# Altium PCB TP-EVALBOARD-R01.PcbDoc (part 2 of 2)
Units mm, origin at the board's own origin, x right, y up, seen from the top; angles counter-clockwise.
Board outline 100.28 x 49.1 mm, 2 copper layers (Top Layer, Bottom Layer), stack 1.695 mm thick; 77 components, 72 nets, 330 pads, 183 vias.
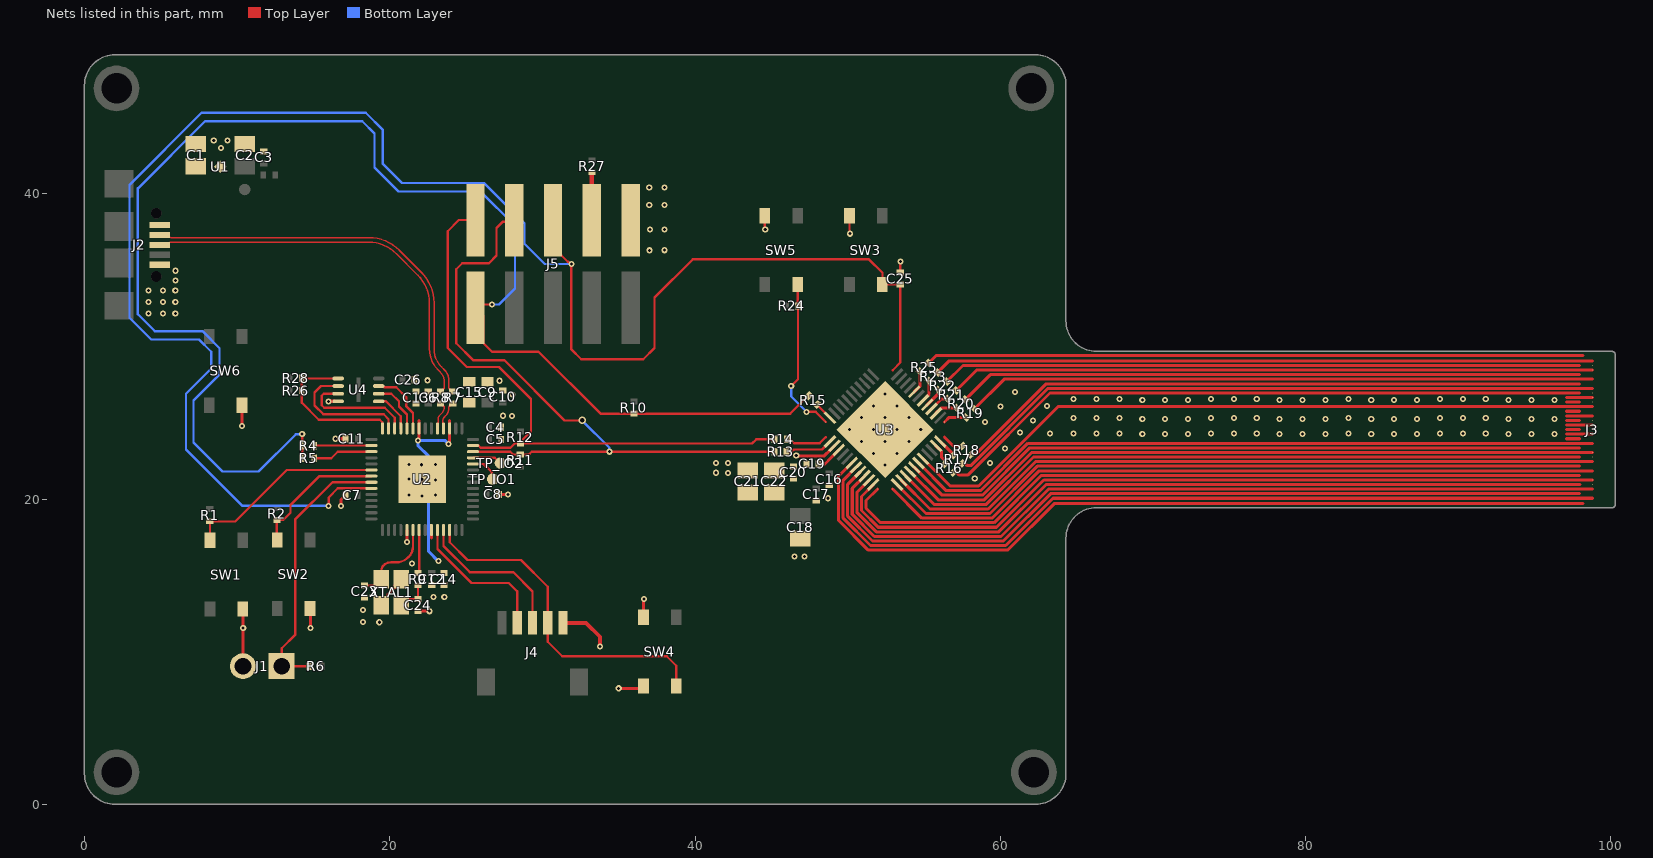
[diagram p2: the nets of this part, all layers, seen from the top]

## Via types
v1: diameter 0.4, hole 0.2, Top Layer to Bottom Layer, tented both sides, 166 vias
v2: diameter 0.5, hole 0.2, Top Layer to Bottom Layer, 16 vias
v3: diameter 0.5, hole 0.3, Top Layer to Bottom Layer, tented both sides, 1 vias

## Nets (pads, with @x,y where several pads share a name; then routed paths per layer and width w, separated by ;. In a path a pad name is that pad's centre, name@x,y a point inside that pad or via, vN(x,y) a via of type N, cw(c..) or ccw(c..) an arc to the next point about the centre after c; other vN are vias at no path point) (continued)
GND: C1.2 C2.2 C3.2 C4.2 C5.2 C6.2 C7.2 C8.2 C9.2 C10.2 C11.2 C12.2 C13.2 C14.2 C15.2 C16.2 C17.2 C18.2 C19.2 C20.2 C21.2 C22.2 C23.2 C24.2 C25.2 C26.2 J1.2 J2.5 J3.15 J3.16 J3.17 J3.18 J3.19 J3.20 J3.21 J3.23 J3.24 J4.5 J5.1 SW1.4 SW2.4 SW3.4 SW4.3 SW4.4 SW5.4 SW6.4 U1.2 U1.5 U2.19 U2.57 U3.3 U3.53 U4.4 XTAL1.2 XTAL1.4 | length 59.7
  Top Layer w0.15: SW5.4@44.575,38.55 44.575,37.675 v1(44.6,37.65) ; v1@50.125,37.375 SW3.4@50.125,38.55 ; C25.2@53.45,34.84 v1(53.45,35.55)
  Top Layer w0.2: v1(10.325,24.775) SW6.4@10.325,26.15 ; SW1.4@10.375,12.8 10.4,12.775 v1(10.4,11.55) 10.38,11.53 J1.2@10.38,9.05 ; SW2.4@14.782,12.821 14.8,12.803 v1(14.8,11.55) ; v1(16.45,23.95) C11.2@17.11,23.95 ; v1(16.8,19.55) 16.8,19.94 C7.2@17.11,20.25 ; XTAL1.2@19.45,13.05 19.85,13.45 19.85,13.726 20.35,14.226 20.35,14.35 XTAL1.4@20.75,14.75 ; v1(21.125,17.175) U2.19@21.125,17.975 ; C24.2@21.901,12.65 v1(22.6,12.65) ; C8.2@27.15,20.3 v1(27.75,20.3) ; v1(35,7.6) 36.475,7.6 SW4.3@36.625,7.75 ; SW4.4@36.625,12.25 36.625,13.425 v1(36.65,13.45) ; v1(46.632,22.864) 46.667,22.829 48.471,22.829 48.849,23.206 U3.3@49.132,23.489 ; 97.08,23.95 97.93,23.95 ; 97.08,24.25 J3.16@98.78,24.25 ; 97.08,24.55 97.93,24.55 ; 97.08,24.85 J3.18@98.78,24.85 ; 97.08,25.15 97.93,25.15 ; 97.08,25.45 J3.20@98.78,25.45 ; 97.08,26.65 J3.24@98.78,26.65 ; 97.092,25.75 97.942,25.75 ; 97.092,26.35 97.942,26.35
  Top Layer w0.25: v1(16,26.4) U4.4@16.375,26.4 ; J4.5@31.35,11.887 32.862,11.887 33.778,10.972 v1(33.778,10.328)
  Bottom Layer w0.2: v2(50.122,24.55) v2(51.677,24.55) ; v2(50.899,23.772) v2(51.677,24.55) ; v2(50.899,25.328) v2(51.677,24.55) ; v2(51.677,22.994) v2(52.455,23.772) ; v2(51.677,26.106) v2(52.455,25.328) ; v2(52.455,22.217) v2(52.455,23.772) ; v2(52.455,26.883) v2(52.455,25.328) ; v2(53.233,22.994) v2(52.455,23.772) ; v2(53.233,26.106) v2(52.455,25.328) ; v2(54.788,24.55) 54.011,24.55 ; v2(51.677,24.55) v2(52.455,25.328) ; v2(51.677,24.55) v2(52.455,23.772) ; v2(51.677,24.55) 52.455,24.55 ; v2(52.455,23.772) 52.455,24.55 ; v2(52.455,23.772) v2(53.233,24.55) ; 52.455,24.55 v2(52.455,25.328) ; 52.455,24.55 v2(53.233,24.55) ; v2(52.455,25.328) v2(53.233,24.55) ; v2(53.233,24.55) v2(54.011,25.328) 54.011,24.55 ; v2(53.233,24.55) v2(54.011,23.772) 54.011,24.55 ; v2(53.233,24.55) 54.011,24.55
  other v1: 19.315,11.927 18.259,11.939 18.259,12.739 22.873,13.574 23.573,13.574 21.455,15.765 46.521,16.243 47.171,16.243 48.7,20.05 22.126,20.197 21.25,20.25 23,20.25 23,21.25 21.25,21.3 22.101,21.297 58.325,21.348 42.163,21.7 41.375,21.722 21.25,22.25 22.076,22.247 23,22.25 41.363,22.35 42.15,22.35 59.325,22.348 60.3,23.3 69.3,24.25 70.8,24.25 72.3,24.25 78.3,24.25 79.8,24.25 81.3,24.25 84.3,24.25 85.8,24.25 87.3,24.25 93.3,24.25 94.8,24.25 96.3,24.25 63.25,24.3 64.8,24.3 66.3,24.3 67.8,24.3 73.8,24.3 75.3,24.3 76.8,24.3 82.8,24.3 88.8,24.3 90.3,24.3 91.8,24.3 61.3,24.35 59,25.05 62.15,25.15 69.3,25.25 70.8,25.25 72.3,25.25 78.3,25.25 79.8,25.25 81.3,25.25 84.3,25.25 85.8,25.25 87.3,25.25 93.3,25.25 94.8,25.25 96.3,25.25 64.8,25.3 66.3,25.3 67.8,25.3 73.8,25.3 75.3,25.3 76.8,25.3 82.8,25.3 88.8,25.3 90.3,25.3 91.8,25.3 28,25.45 27.419,25.455 60,26.05 63.05,26.1 69.3,26.5 70.8,26.5 72.3,26.5 78.3,26.5 79.8,26.5 81.3,26.5 84.3,26.5 85.8,26.5 87.3,26.5 93.3,26.5 94.8,26.5 96.3,26.5 64.8,26.55 66.3,26.55 67.8,26.55 73.8,26.55 75.3,26.55 76.8,26.55 82.8,26.55 88.8,26.55 90.3,26.55 91.8,26.55 28.05,26.85 60.95,27 27.2,27.75 22.48,27.778 4.2,32.15 5.15,32.15 5.95,32.15 4.2,32.9 5.15,32.9 5.95,32.9 4.2,33.65 5.15,33.65 5.95,33.65 5.96,34.304 5.96,34.954 37.024,36.296 38,36.3 50.141,37.381 37.05,37.65 38,37.65 37,39.25 38,39.25 37,40.4 38,40.4 8.95,43 8.47,43.491 9.37,43.491
GPIO4_RND: R1.2 SW1.1 U2.6 | length 13.2
  Top Layer w0.15: SW1.1@8.225,17.3 8.225,18.53 9.22,18.53 9.88,18.53 13.25,21.9 U2.6@18.8,21.9
GPIO5_RND: R2.2 SW2.1 U2.7 | length 8.8
  Top Layer w0.15: SW2.1@12.6,17.353 R2.2@12.6,18.51 ; R2.2@12.613,18.629 13.029,18.629 13.5,19.1 13.5,19.6 15.4,21.5 U2.7@18.8,21.5
GPIO6_SNAP_DOME: J1.1 R6.1 U2.8 | length 17.8
  Top Layer w0.15: R6.1@14.75,9.05 J1.1@12.92,9.05 12.92,10.22 13.8,11.1 13.8,18.65 16.25,21.1 U2.8@18.8,21.1
GPIO7_IQS_nRST: C25.1 J5.5 SW3.1 U2.9 U3.39 | length 116.8
  Top Layer w0.15: v1(16,19.55) 16,20.1 16.6,20.7 U2.9@18.8,20.7 ; J5.5@31.225,37.75 J5.5@30.7,38.275 30.7,36.5 31.225,35.975 31.241,35.975 31.668,35.548 31.687,35.548 31.835,35.4 v1(31.9,35.4) 31.9,29.8 32.55,29.15 36.6,29.15 37.35,29.9 37.35,33.2 39.85,35.7 51.4,35.7 52.275,34.825 SW3.1@52.275,34.05 C25.1@53.45,34.05 53.45,28.939 U3.39@52.95,28.439
  Bottom Layer w0.15: v1(16,19.55) 10.35,19.55 6.65,23.25 6.65,26.9 8.3,28.55 8.3,29.65 7.5,30.45 4.372,30.45 2.95,31.872 2.95,40.578 7.672,45.3 18.428,45.3 19.55,44.178 19.55,41.95 20.8,40.7 26.178,40.7 28.828,38.05 28.828,36.722 30.15,35.4 v1(31.9,35.4)
I2C_SCL: J5.9 R12.1 R14.1 U2.41 | length 39.8
  Top Layer w0.15: U2.41@25.45,23.5 25.46,23.49 25.833,23.49 25.973,23.35 27.9,23.35 28.186,23.636 28.56,23.636 R12.1@28.564,23.64 43.74,23.64 44.007,23.907 R14.1@45.213,23.907 ; J5.9@25.62,38.275 24.525,38.275 23.8,37.55 23.8,29.9 25.05,28.65 27.15,28.65 29.25,26.55 29.25,24.422 28.729,23.901 28.729,23.755 R12.1@28.627,23.654
I2C_SDA: J5.7 R11.1 R13.1 U2.40 | length 44.1
  Top Layer w0.15: U2.40@25.45,23.1 27.9,23.1 28.077,22.923 29.123,22.923 29.3,23.1 v1(34.4,23.1) R13.1@45.21,23.1 ; J5.7@28.16,38.275 28.058,38.173 27.423,38.173 27,37.75 27,35.945 26.505,35.45 24.75,35.45 24.35,35.05 24.35,30.2 25.45,29.1 27.5,29.1 31.45,25.15 v3(32.6,25.15)
  Bottom Layer w0.15: v3(32.6,25.15) 34.374,23.376 34.374,23.126 v1(34.4,23.1)
IQS_RDY: J5.10 R4.2 R5.2 R10.1 R15.1 | length 96
  Top Layer w0.15: R5.2@14.265,22.672 R4.2@14.265,23.5 v1(14.265,24.25) ; v1(26.7,32.75) 25.845,32.75 J5.10@25.62,32.525 26.145,32 26.145,30.205 26.7,29.65 29.75,29.65 33.805,25.595 R10.1@36,25.595 46.245,25.595 R15.1@47.45,26.8
  Bottom Layer w0.15: v1(14.265,24.25) 13.85,24.25 11.4,21.8 9.05,21.8 7.15,23.7 7.15,26.45 8.85,28.15 8.85,29.878 7.728,31 4.6,31 3.5,32.1 3.5,40.35 7.9,44.75 18.2,44.75 19,43.95 19,41.722 20.572,40.15 25.95,40.15 28.2,37.9 28.2,33.8 27.15,32.75 v1(26.7,32.75)
IQS_RX0: J3.25 R16.2 | length 43.4
  Top Layer w0.2: R16.2@56.93,21.753 56.966,21.788 57.093,21.788 57.319,21.562 57.862,21.562 63.25,26.95 64.3,26.95 94.299,26.95 94.3,26.95 97.942,26.95
IQS_RX1: J3.33 R25.2 | length 43.1
  Top Layer w0.2: R25.2@55.3,28.9 55.8,29.4 98.18,29.4
IQS_RX2: J3.31 R22.2 | length 41.9
  Top Layer w0.2: R22.2@56.5,27.7 57.55,28.75 97.93,28.75
IQS_RX3: J3.29 R20.2 | length 40.9
  Top Layer w0.2: R20.2@57.709,26.509 59.35,28.15 97.93,28.15
IQS_RX4: J3.27 R18.2 | length 41.8
  Top Layer w0.2: R18.2@58.08,22.903 58.116,22.938 58.388,22.938 63,27.55 64.3,27.55 94.299,27.55 94.3,27.55 97.93,27.55
IQS_RX5: J3.26 R17.2 | length 43.5
  Top Layer w0.2: R17.2@57.501,22.332 57.536,22.368 57.664,22.368 57.842,22.19 58.064,22.19 63.124,27.25 64.3,27.25 94.299,27.25 94.3,27.25 98.53,27.25 98.534,27.25 J3.26@98.78,27.25
IQS_RX6: J3.28 R19.2 | length 41.3
  Top Layer w0.2: R19.2@58.309,25.909 60.25,27.85 J3.28@98.78,27.85
IQS_RX7: J3.32 R23.2 | length 43.2
  Top Layer w0.2: R23.2@55.9,28.3 56.65,29.05 97.08,29.05 J3.32@98.78,29.05
IQS_RX8: J3.30 R21.2 | length 42.2
  Top Layer w0.2: R21.2@57.109,27.109 58.45,28.45 J3.30@98.78,28.45
IQS_SW_IN: R24.1 SW5.1 U3.52 | length 10.5
  Top Layer w0.15: v1(46.3,27.4) 46.74,27.84 R24.1@46.74,32.65 46.725,32.665 SW5.1@46.725,34.05 ; v1(47.311,25.711) 47.9,25.711 U3.52@48.566,25.045
  Bottom Layer w0.15: v1(46.3,27.4) 46.3,26.722 v1(47.311,25.711)
IQS_TX0: J3.14 U3.20 | length 46.2
  Top Layer w0.2: U3.20@54.647,22.358 56.455,20.55 58.704,20.55 61.804,23.65 61.879,23.65 62.6,23.65 J3.14@98.78,23.65
IQS_TX1: J3.12 U3.18 | length 46.7
  Top Layer w0.2: U3.18@54.081,21.792 55.924,19.95 58.953,19.95 62.053,23.05 62.127,23.05 64.3,23.05 94.297,23.05 94.299,23.05 98.53,23.05 98.534,23.05 J3.12@98.78,23.05
IQS_TX2: J3.2 U3.8 | length 54.8
  Top Layer w0.2: U3.8@50.546,22.075 49.7,21.229 49.7,18.75 51.5,16.95 60.35,16.95 63.45,20.05 J3.2@98.78,20.05
IQS_TX3: J3.4 U3.10 | length 53.2
  Top Layer w0.2: U3.10@51.112,21.509 50.3,20.698 50.3,19 51.75,17.55 60.05,17.55 63.15,20.65 64.3,20.65 J3.4@98.78,20.65
IQS_TX4: J3.6 U3.12 | length 51.6
  Top Layer w0.2: U3.12@51.677,20.944 50.9,20.167 50.9,19.249 51.999,18.15 59.75,18.15 62.85,21.25 64.3,21.25 94.297,21.25 94.299,21.25 98.53,21.25 98.534,21.25 J3.6@98.78,21.25
IQS_TX5: J3.8 U3.14 | length 47.9
  Top Layer w0.2: U3.14@52.95,20.661 54.861,18.75 59.45,18.75 62.55,21.85 64.3,21.85 94.297,21.85 94.299,21.85 98.53,21.85 98.534,21.85 J3.8@98.78,21.85
IQS_TX6: J3.10 U3.16 | length 47.3
  Top Layer w0.2: U3.16@53.516,21.227 55.392,19.35 59.201,19.35 62.301,22.45 62.376,22.45 64.3,22.45 94.297,22.45 94.299,22.45 98.53,22.45 98.534,22.45 J3.10@98.78,22.45
IQS_TX7: J3.22 U3.21 | length 46.7
  Top Layer w0.2: U3.21@54.93,22.641 56.721,20.85 58.58,20.85 61.68,23.95 ; 61.681,23.95 63.781,26.05 J3.22@98.78,26.05
IQS_TX8: J3.1 U3.7 | length 55
  Top Layer w0.2: U3.7@50.263,22.358 49.4,21.495 49.4,18.6 51.35,16.65 60.474,16.65 63.524,19.7 98.18,19.7
IQS_TX9: J3.3 U3.9 | length 53.1
  Top Layer w0.2: U3.9@50.829,21.792 50,20.964 50,18.876 51.626,17.25 60.2,17.25 63.3,20.35 97.931,20.35
IQS_TX10: J3.5 U3.11 | length 51.6
  Top Layer w0.2: U3.11@51.394,21.227 50.6,20.432 50.6,19.124 51.874,17.85 59.9,17.85 63,20.95 97.981,20.95
IQS_TX11: J3.7 U3.13 | length 50
  Top Layer w0.2: U3.13@51.96,20.661 51.2,19.901 51.2,19.4 52.15,18.45 59.6,18.45 62.7,21.55 63.851,21.55 97.931,21.55
IQS_TX12: J3.9 U3.15 | length 46.8
  Top Layer w0.2: U3.15@53.233,20.944 55.127,19.05 59.326,19.05 62.426,22.15 62.5,22.15 64.3,22.15 94.297,22.15 94.299,22.15 97.93,22.15
IQS_TX13: J3.11 U3.17 | length 46.2
  Top Layer w0.2: U3.17@53.799,21.509 55.658,19.65 59.077,19.65 62.177,22.75 62.251,22.75 64.3,22.75 94.297,22.75 94.299,22.75 97.93,22.75
IQS_TX14: J3.13 U3.19 | length 45.6
  Top Layer w0.2: U3.19@54.364,22.075 56.189,20.25 58.829,20.25 61.929,23.35 62.003,23.35 62.724,23.35 97.93,23.35
NetC24_1: C24.1 R9.1 XTAL1.3 | length 2.1
  Top Layer w0.15: XTAL1.3@20.75,13.05 21.15,13.45 C24.1@21.852,13.45 ; C24.1@21.85,13.538 R9.1@21.85,14.355
NetJ5_3: J5.3 R27.2 | length 3.2
  Top Layer w0.2: R27.2@33.22,41.375 R27.2@33.28,41.435
  Top Layer w0.3: J5.3@33.24,38.275 R27.2@33.24,41.39
NetR4_1: R4.1 U2.2 | length 3.7
  Top Layer w0.15: R4.1@15.055,23.5 U2.2@18.8,23.5
NetR5_1: R5.1 U2.3 | length 3.9
  Top Layer w0.15: R5.1@15.049,22.666 16.166,22.666 16.6,23.1 U2.3@18.8,23.1
NetR13_2: R13.2 U3.2 | length 3.1
  Top Layer w0.15: R13.2@46,23.1 46.338,23.1 46.477,23.239 48.315,23.239 U3.2@48.849,23.772
NetR14_2: R14.2 U3.1 | length 2.8
  Top Layer w0.15: R14.2@46.003,23.907 46.091,23.82 46.33,23.82 46.5,23.65 48.161,23.65 U3.1@48.566,24.055
NetR15_2: R15.2 U3.51 | length 1.3
  Top Layer w0.15: R15.2@48.009,26.241 48.009,26.168 U3.51@48.849,25.328
NetR16_1: R16.1 U3.24 | length 1.5
  Top Layer w0.2: U3.24@55.778,23.489 56.146,23.122 56.146,22.735 56.407,22.474 56.407,22.347 R16.1@56.372,22.312
NetR17_1: R17.1 U3.25 | length 1.2
  Top Layer w0.2: U3.25@56.061,23.772 U3.25@56.386,23.448 ; U3.25@56.386,23.448 R17.1@56.942,22.891
NetR18_1: R18.1 U3.26 | length 1.5
  Top Layer w0.2: U3.26@56.344,24.055 56.937,23.462 57.324,23.462 57.359,23.426 57.486,23.426 R18.1@57.522,23.462
NetR19_1: R19.1 U3.27 | length 1.6
  Top Layer w0.2: U3.27@56.344,25.045 56.649,25.35 57.552,25.35 57.587,25.385 57.715,25.385 R19.1@57.75,25.35
NetR20_1: R20.1 U3.29 | length 1.5
  Top Layer w0.2: U3.29@55.778,25.611 56.12,25.952 56.427,25.952 56.429,25.95 56.952,25.95 56.987,25.985 57.115,25.985 R20.1@57.15,25.95
NetR21_1: R21.1 U3.30 | length 1.4
  Top Layer w0.2: U3.30@55.496,25.894 56.152,26.55 56.352,26.55 56.387,26.585 56.515,26.585 R21.1@56.55,26.55
NetR22_1: R22.1 U3.31 | length 1.3
  Top Layer w0.2: U3.31@55.213,26.176 55.941,26.905 55.941,26.943 55.977,26.979 55.977,27.106 R22.1@55.941,27.141
NetR23_1: R23.1 U3.32 | length 1.5
  Top Layer w0.2: U3.32@54.93,26.459 55.341,26.871 55.341,27.543 55.377,27.579 55.377,27.706 R23.1@55.341,27.741
NetR25_1: R25.1 U3.34 | length 1.5
  Top Layer w0.2: U3.34@54.364,27.025 54.747,27.407 54.747,28.149 54.777,28.179 54.777,28.306 R25.1@54.741,28.341
NetTP_IO1_TP: TP_IO1.TP U2.38 | length 1.8
  Top Layer w0.15: U2.38@25.45,22.3 26.15,22.3 26.676,21.774 TP_IO1.TP@26.676,21.374
NetTP_IO2_TP: TP_IO2.TP U2.39 | length 1.9
  Top Layer w0.15: U2.39@25.45,22.7 26.876,22.7 TP_IO2.TP@27.226,22.35
QSPI_SCLK: U2.52 U4.6 | length 3.5
  Top Layer w0.15: U4.6@19.275,26.9 20.1,26.9 20.6,26.4 20.6,26.065 21.125,25.54 U2.52@21.125,24.625
QSPI_SD0: U2.53 U4.5 | length 2.7
  Top Layer w0.15: U4.5@19.275,26.4 19.752,26.4 20.725,25.427 U2.53@20.725,24.625
QSPI_SD1: U2.55 U4.2 | length 8.4
  Top Layer w0.15: U4.2@16.625,27.4 15.5,27.4 15.077,26.977 15.077,26.123 15.652,25.548 19.602,25.548 19.925,25.225 U2.55@19.925,24.625
QSPI_SD2: U2.54 U4.3 | length 7.6
  Top Layer w0.15: U4.3@16.625,26.9 15.684,26.9 15.55,26.766 15.55,26.142 15.715,25.977 19.673,25.977 20.325,25.325 U2.54@20.325,24.625
QSPI_SD3: U2.51 U4.7 | length 4.3
  Top Layer w0.15: U4.7@19.275,27.4 19.552,27.4 19.636,27.316 20.42,27.316 21.09,26.646 21.09,26.07 21.525,25.635 U2.51@21.525,24.625
QSPI_SS: R26.2 R28.2 U2.56 U4.1 | length 10.2
  Top Layer w0.15: U4.1@16.625,27.9 14.244,27.9 14.235,27.891 R26.2@14.235,27.104 14.235,26.315 15.352,25.198 19.352,25.198 19.515,25.035 19.515,24.635 U2.56@19.525,24.625
RUN: J4.4 SW4.1 U2.26 | length 22.4
  Top Layer w0.15: U2.26@23.925,17.975 23.925,17.175 25.1,16 28.6,16 30.35,14.25 J4.4@30.35,11.887 30.35,10.65 31.3,9.7 38.15,9.7 38.775,9.075 SW4.1@38.775,7.75
SWCLK: J4.2 U2.24 | length 10.4
  Top Layer w0.15: U2.24@23.125,17.975 23.125,16.725 25.35,14.5 27.8,14.5 28.35,13.95 J4.2@28.35,11.887 28.558,12.095 J4.2@28.558,12.542
SWDIO: J4.3 U2.25 | length 9.4
  Top Layer w0.15: U2.25@23.525,17.975 23.525,16.925 25.25,15.2 28.1,15.2 29.35,13.95 29.35,12.7
USB_D_N: J2.2 R7.1 | length 26
  Top Layer w0.1: J2.2@5.401,37.299 5.488,37.212 ccw(c5.698,37.423) 5.489,37.211 ccw(c5.698,37.423) 5.698,37.125 18.625,37.125 cw(c18.625,34.289) 20.63,36.294 22.069,34.855 cw(c20.064,32.85) 22.9,32.85 22.9,29.85 ccw(c24.59,29.85) 23.395,28.655 23.546,28.504 cw(c22.751,27.709) 23.875,27.709 23.875,27.285 ccw(c23.975,27.285) 23.904,27.214 23.915,27.203 ccw(c23.959,27.247) 23.959,27.185 cw(c23.959,27.123) 24.003,27.167 R7.1@24.125,27.045
USB_D_P: J2.3 R8.1 | length 26
  Top Layer w0.1: J2.3@4.925,36.65 5.276,36.65 ccw(c5.276,36.949) 5.488,36.738 cw(c5.699,36.526) 5.699,36.825 18.623,36.825 cw(c18.623,34.285) 20.419,36.081 21.856,34.644 cw(c20.06,32.848) 22.6,32.848 22.6,29.848 ccw(c24.584,29.848) 23.181,28.445 23.29,28.336 cw(c22.601,27.647) 23.575,27.647 23.575,27.285 cw(c23.475,27.285) 23.546,27.214 23.535,27.203 cw(c23.491,27.247) 23.491,27.185 ccw(c23.491,27.123) 23.447,27.167 R8.1@23.325,27.045
USB_MCU_D_N: R7.2 U2.46 | length 1.9
  Top Layer w0.1: U2.46@23.525,24.625 23.525,24.917 ccw(c23.44,24.917) 23.5,24.977 cw(c23.56,25.037) 23.475,25.037 23.475,25.134 cw(c23.793,25.134) 23.568,25.359 ; 23.568,25.359 23.675,25.466 ccw(c23.192,25.949) 23.875,25.949 23.875,25.999 cw(c24.013,25.999) 23.915,26.097 cw(c23.959,26.053) 23.959,26.115 ccw(c23.959,26.177) 24.003,26.133 R7.2@24.125,26.255
USB_MCU_D_P: R8.2 U2.47 | length 1.9
  Top Layer w0.1: U2.47@23.125,24.625 23.125,24.917 cw(c23.21,24.917) 23.15,24.977 ccw(c23.09,25.037) 23.175,25.037 23.175,25.267 cw(c23.473,25.267) 23.262,25.477 23.427,25.642 ; R8.2@23.325,26.255 23.447,26.133 ccw(c23.491,26.177) 23.491,26.115 cw(c23.491,26.053) 23.535,26.097 cw(c23.437,25.999) 23.575,25.999 cw(c23.07,25.999) 23.427,25.642
VBUS: C1.1 J2.1 U1.3 U1.4
VREG: C19.1 C20.1 C21.1 C22.1 U3.4 | length 1.7
  Top Layer w0.2: C19.1@48.09,22.3 48.508,22.3 48.89,22.682 U3.4@49.414,23.206
VREG_VOUT: C13.1 C14.1 C15.1 U2.23 U2.45 U2.50 | length 14
  Top Layer w0.2: v1(21.838,23.846) 21.838,23.9 21.925,23.987 21.925,25.153 ; 22.725,17.447 U2.23@22.725,17.975 ; v1(23.85,23.6) 23.85,23.654 23.925,23.729 U2.45@23.925,24.625 23.925,25.153
  Bottom Layer w0.2: v1(23.183,15.927) 22.55,16.56 22.55,22.8 21.838,23.512 v1(21.838,23.846) 23.604,23.846 v1(23.85,23.6)
XIN: C23.1 U2.20 XTAL1.1 | length 5.8
  Top Layer w0.15: C23.1@18.35,14.34 19.04,14.34 XTAL1.1@19.45,14.75 19.45,15.288 cw(c19.962,15.288) 19.6,15.65 cw(c20.083,15.167) 20.083,15.85 20.396,15.85 ccw(c20.396,17.033) 21.233,16.196 ccw(c20.528,16.902) 21.525,16.902 U2.20@21.525,17.975
XOUT: R9.2 U2.21 | length 2.8
  Top Layer w0.15: R9.2@21.925,15.17 U2.21@21.925,17.975
pads on no net: J2.MH1 J2.MH2 J2.Shell J4.MT J5.2 J5.4 J5.6 J5.8 MP1.4 MP2.4 MP3.4 MP4.4 SW1.2 SW1.3 SW2.2 SW2.3 SW3.2 SW3.3 SW4.2 SW5.2 SW5.3 SW6.2 SW6.3 U2.4 U2.5 U2.11 U2.12 U2.13 U2.14 U2.15 U2.16 U2.17 U2.18 U2.27 U2.28 U2.29 U2.30 U2.31 U2.32 U2.34 U2.35 U2.36 U2.37 U3.6 U3.22 U3.23 U3.28 U3.33 U3.35 U3.36 U3.37 U3.38 U3.40 U3.41 U3.42 U3.43 U3.44 U3.45 U3.46 U3.47 U3.48 U3.49 U3.50 U4.9

## Polygon pours and split planes (outlines as drawn)
no net on Layer0 "Default Coverlay 1 Bottom" (split plane): 0,1.803 0.077,1.417 0.228,1.053 0.446,0.725 0.725,0.447 1.053,0.228 1.417,0.077 1.803,0 62.497,0 62.883,0.077 63.247,0.228 63.575,0.447 63.854,0.725 64.072,1.053 64.223,1.417 64.3,1.803 64.3,17.43 64.31,17.626 64.386,18.011 64.536,18.373 64.754,18.699 65.031,18.976 65.357,19.194 65.719,19.344 66.104,19.42 66.3,19.43 94.297,19.43 98.53,19.43 100.08,19.43 100.12,19.43 100.193,19.46 100.25,19.517 100.28,19.59 100.28,19.63 100.28,29.47 100.28,29.51 100.25,29.583 100.193,29.64 100.12,29.67 100.08,29.67 94.3,29.67 66.3,29.67 66.104,29.68 65.719,29.756 65.357,29.906 65.031,30.124 64.754,30.401 64.536,30.727 64.386,31.089 64.31,31.474 64.3,31.67 64.3,47.1 64.3,47.297 64.223,47.683 64.072,48.047 63.854,48.375 63.575,48.654 63.247,48.872 62.883,49.023 62.497,49.1 1.803,49.1 1.417,49.023 1.053,48.872 0.725,48.654 0.446,48.375 0.228,48.047 0.077,47.683 0,47.297 0,47.1
no net on Layer0 "Default Coverlay 5 Bottom" (split plane): 100.08,19.43 100.12,19.43 100.193,19.46 100.25,19.517 100.28,19.59 100.28,19.63 100.28,29.47 100.28,29.51 100.25,29.583 100.193,29.64 100.12,29.67 100.08,29.67 98.534,29.67 98.53,19.43
no net on Layer0 "Default Coverlay 4 Top" (split plane): 100.28,19.63 100.28,29.47 100.28,29.51 100.25,29.583 100.193,29.64 100.12,29.67 100.08,29.67 94.3,29.67 94.297,19.43 100.08,19.43 100.12,19.43 100.193,19.46 100.25,19.517 100.28,19.59 100.28,19.63
GND on Bottom Layer "NONET_L04_P-001" (solid, remove dead copper, pour order 23): 0,2 ccw(c2,2) 2,0 62.3,0 ccw(c62.3,2) 64.3,2 64.3,17.43 cw(c66.3,17.43) 66.3,19.43 94.297,19.43 98.53,19.43 100.08,19.43 ccw(c100.08,19.63) 100.28,19.63 100.28,29.47 ccw(c100.08,29.47) 100.08,29.67 94.3,29.67 66.3,29.67 cw(c66.3,31.67) 64.3,31.67 64.3,47.1 ccw(c62.3,47.1) 62.3,49.1 2,49.1 ccw(c2,47.1) 0,47.1
3V3 on Bottom Layer "NONET_L04_P-001" (solid, pour order 21): 44.35,19.55 45.7,19.55 45.7,5.75 42.75,2.8 9.15,2.8 1,10.95 1,41.8 6.95,47.75 23.3,47.75 24.55,46.5 24.55,42.95 23.05,41.45 21.75,41.45 20.45,42.75 20.45,44.9 19,46.35 7.8,46.35 2.55,41.1 2.55,31.45 5.7,28.3 5.7,8.4 10.05,4.05 41.95,4.05 44.35,6.45
no net on Layer0 "Default Coverlay 4 Bottom" (split plane): 100.28,19.63 100.28,29.47 100.28,29.51 100.25,29.583 100.193,29.64 100.12,29.67 100.08,29.67 94.3,29.67 94.297,19.43 100.08,19.43 100.12,19.43 100.193,19.46 100.25,19.517 100.28,19.59 100.28,19.63
GND on Top Layer "NONET_L04_P-001" (solid, pour order 48): 62.6,27.85 60.723,27.85 57.222,24.349 58.51,23.06 63,27.55
3V3 on Top Layer "NONET_L04_P-001" (solid, pour order 47): 20,23.85 20.95,23.85 21.35,23.45 21.966,23.45 22.216,23.7 22.8,23.7 22.95,23.55 22.95,23.25 22.8,23.1 20.15,23.1 20,22.95
GND on Top Layer "NONET_L04_P-001" (solid, pour order 46): 35.18,40.65 35.33,40.8 38.25,40.8 38.55,40.5 38.55,36.05 38.2,35.7 35.38,35.7 35.18,35.9
3V3 on Top Layer "NONET_L04_P-001" (solid, pour order 45): 18.862,24 19.9,24 20.05,23.85 20.05,19.55 20.35,19.25 23.9,19.25 24.25,19.6 24.25,24.053 24.315,24.119 24.802,24.119 24.905,24.015 24.905,18.966 24.639,18.7 19.6,18.7 19.329,18.971 19.329,20.146 19.275,20.2 19.009,20.2 19.009,20.402 19.277,20.402 19.329,20.465 19.329,23.601 19.118,23.812 18.878,23.812
3V3 on Top Layer "NONET_L04_P-001" (solid, pour order 35): 24.223,25.08 24.229,25.086 24.229,25.229 24.389,25.389 25.693,25.389 25.938,25.634 25.938,26.646 26.013,26.721 26.873,26.721 26.953,26.641 26.953,25.101 26.788,24.935 26.788,24.282 26.788,23.635 26.747,23.594 26.135,23.594 25.892,23.837 25.892,24.851 25.668,25.074 24.226,25.074
GND on Top Layer "NONET_L04_P-001" (solid, pour order 44): 24.807,27.99 27.31,27.99 28.3,27 28.3,26.7 28.2,26.6 27.5,26.6 26.74,27.36 24.803,27.36
GND on Top Layer "NONET_L04_P-001" (solid, pour order 43): 27.11,23.66 27.105,23.665 27.105,25.705 27.3,25.9 27.95,25.9 28.3,25.55 28.3,25 27.75,24.45 27.75,23.92 27.49,23.66
GND on Top Layer "NONET_L04_P-001" (solid, pour order 42): 46.225,17.95 46.225,15.675 46.45,15.45 47.3,15.45 47.574,15.724 47.574,17.949 47.575,17.95
GND on Top Layer "NONET_L04_P-001" (solid, pour order 41): 21.252,14.15 20.251,14.146 20.25,15.35 20.5,15.6 20.9,15.6 21.3,16 21.637,16 21.702,15.935 21.7,15.6 21.612,15.525 21.425,15.525 21.25,15.35
GND on Top Layer "NONET_L04_P-001" (solid, pour order 40): 22.414,14.538 22.414,13.301 22.576,13.139 23.789,13.139 23.955,13.305 23.955,14.551 23.874,14.633 22.509,14.633
VREG_VOUT on Top Layer "NONET_L04_P-001" (solid, pour order 37): 23.318,14.852 23.251,14.919 23.251,15.549 22.626,16.174 22.626,17.547 22.828,17.547 22.828,16.572 23.835,15.565 23.835,14.902 23.785,14.852
3V3 on Top Layer "NONET_L04_P-001" (solid, pour order 36): 22.518,14.869 22.451,14.937 22.451,15.404 22.224,15.63 22.224,17.565 22.425,17.565 22.425,16.025 23.034,15.416 23.034,14.919 22.985,14.869
VREG_VOUT on Top Layer "NONET_L04_P-001" (solid, pour order 34): 23.824,25.124 23.824,25.248 24.034,25.596 24.178,25.835 24.763,25.835 24.763,26.625 24.839,26.7 25.605,26.7 25.673,26.633 25.673,25.759 25.463,25.55 24.25,25.55 24.019,25.122
VREG_VOUT on Top Layer "NONET_L-01_P-001" (solid, remove dead copper, pour order 32): 22.025,26.388 22.025,25.074 21.827,25.074 21.827,25.656 21.408,26.075 21.408,26.405 21.458,26.455 21.958,26.455
3V3 on Top Layer "NONET_L04_P-001" (solid, pour order 27): 21.03,28.061 21.056,28.03 21.056,27.572 21.037,27.546 20.096,27.546 19.846,27.735 18.978,27.735 18.886,27.833 18.886,27.974 18.957,28.061 18.98,28.061
3V3 on Top Layer "NONET_L-01_P-001" (solid, remove dead copper, pour order 30): 22.825,26.405 22.825,25.105 22.225,25.105 22.225,26.405 22.275,26.455 22.775,26.455
GND on Top Layer "NONET_L-01_P-001" (solid, remove dead copper, pour order 28): 22.825,26.878 22.775,26.828 21.475,26.828 21.425,26.878 21.425,28.028 21.475,28.078 22.775,28.078 22.825,28.028
3V3 on Top Layer "NONET_L04_P-001" (solid, pour order 20): 46.225,19.545 46.22,19.55 44.35,19.55 44.35,18.55 44.55,18.35 47.575,18.35 47.575,19.36
GND on Top Layer "NONET_L04_P-001" (solid, pour order 0): 64.45,26.95 63.261,26.95 58.078,21.788 57.199,21.788 56.895,21.449 56.721,20.85 58.58,20.85 63.6,26.25 64.45,26.25
GND on Top Layer "NONET_L04_P-001" (solid, pour order 1): 63.894,25.85 63.58,25.85 61.68,23.95 61.68,23.85 63.894,23.85
VREG on Top Layer "NONET_L04_P-001" (solid, pour order 5): 47.9,22.54 47.9,22.06 46.69,21.54 46.21,21.54 46.21,21.16 46.013,20.95 42.775,20.95 42.775,19.9 45.87,19.9 46.601,20.381 48.28,22.06 48.28,22.54
GND on Top Layer "NONET_L04_P-001" (solid, pour order 11): 18.59,13.74 17.54,13.74 17.2,13.4 17.2,12.15 17.85,11.5 19.6,11.5 19.95,11.85 19.95,13.65 18.68,13.65
3V3_REG on Top Layer "NONET_L04_P-001" (solid, pour order 12): 9.139,41.295 9.131,41.303 9.131,41.421 9.314,41.605 9.69,41.605 9.825,41.74 9.825,42.325 11.175,42.325 11.325,42.175 11.99,42.175 11.99,41.795 11.9,41.705 11.9,40.985 11.52,40.985 11.23,41.275 9.825,41.275 9.805,41.295 9.129,41.295
GND on Top Layer "NONET_L04_P-001" (solid, pour order 16): 6.625,43.775 11.175,43.775 11.985,42.965 11.99,42.965 11.99,42.587 11.512,42.587 11.51,42.585 11.37,42.725 9.825,42.725 9.589,42.489 9.589,41.945 9.31,41.945 9.31,41.775 8.9,41.365 8.491,41.775 8.9,42.185 8.9,42.365 8.9,42.484 8.659,42.725 6.625,42.725
GND on Top Layer "NONET_L04_P-001" (solid, pour order 18): 4.214,35.555 3.972,35.294 3.972,34.2 3.973,31.596 4.139,31.43 6.239,31.43 6.339,31.53 6.339,35.33 6.114,35.555
VBUS on Top Layer "NONET_L04_P-001" (solid, pour order 19): 8.671,42.255 8.671,42.13 8.485,41.945 8.394,41.945 8.394,41.605 8.486,41.605 8.67,41.42 8.67,41.295 7.995,41.295 7.1,40.4 7.1,38.4 6.45,37.75 4.25,37.75 3.972,38.028 3.972,40.022 6.275,42.325 7.975,42.325 8.045,42.255 8.668,42.255
no net on Layer0 "Default Coverlay 1 Top" (split plane): 0,1.803 0.077,1.417 0.228,1.053 0.446,0.725 0.725,0.447 1.053,0.228 1.417,0.077 1.803,0 62.497,0 62.883,0.077 63.247,0.228 63.575,0.447 63.854,0.725 64.072,1.053 64.223,1.417 64.3,1.803 64.3,17.43 64.31,17.626 64.386,18.011 64.536,18.373 64.754,18.699 65.031,18.976 65.357,19.194 65.719,19.344 66.104,19.42 66.3,19.43 94.297,19.43 98.53,19.43 100.08,19.43 100.12,19.43 100.193,19.46 100.25,19.517 100.28,19.59 100.28,19.63 100.28,29.47 100.28,29.51 100.25,29.583 100.193,29.64 100.12,29.67 100.08,29.67 94.3,29.67 66.3,29.67 66.104,29.68 65.719,29.756 65.357,29.906 65.031,30.124 64.754,30.401 64.536,30.727 64.386,31.089 64.31,31.474 64.3,31.67 64.3,47.1 64.3,47.297 64.223,47.683 64.072,48.047 63.854,48.375 63.575,48.654 63.247,48.872 62.883,49.023 62.497,49.1 1.803,49.1 1.417,49.023 1.053,48.872 0.725,48.654 0.446,48.375 0.228,48.047 0.077,47.683 0,47.297 0,47.1
no net on Layer0 "Default Coverlay 3 Top" (split plane): 64.3,17.43 64.31,17.626 64.386,18.011 64.536,18.373 64.754,18.699 65.031,18.976 65.357,19.194 65.719,19.344 66.104,19.42 66.3,19.43 94.297,19.43 94.3,29.67 66.3,29.67 66.104,29.68 65.719,29.756 65.357,29.906 65.031,30.124 64.754,30.401 64.536,30.727 64.386,31.089 64.31,31.474 64.3,31.67
no net on Layer0 "Default Coverlay 3 Bottom" (split plane): 64.3,17.43 64.31,17.626 64.386,18.011 64.536,18.373 64.754,18.699 65.031,18.976 65.357,19.194 65.719,19.344 66.104,19.42 66.3,19.43 94.297,19.43 94.3,29.67 66.3,29.67 66.104,29.68 65.719,29.756 65.357,29.906 65.031,30.124 64.754,30.401 64.536,30.727 64.386,31.089 64.31,31.474 64.3,31.67

## Other copper
Top Layer:
  region net GND: 47.49,22.594 47.49,22.06 46.8,22.06 46.69,21.95 45.875,21.95 45.875,21.35 41.05,21.35 40.85,21.55 40.85,22.45 41.1,22.7 42.5,22.7 42.606,22.594
  region net IQS_RX1: 98.53,29.5 98.18,29.5 98.18,29.3 98.53,29.3
  region net IQS_RX7: 98.53,29.2 98.18,29.2 98.03,29.15 98.03,28.95 98.18,28.9 98.53,28.9
  region net IQS_RX2: 98.53,28.8 98.18,28.8 98.03,28.85 97.93,28.85 97.93,28.65 98.03,28.65 98.18,28.7 98.53,28.7
  region net IQS_RX8: 98.53,28.6 98.18,28.6 98.03,28.55 98.03,28.35 98.18,28.3 98.53,28.3
  region net IQS_RX3: 98.53,28.2 98.18,28.2 98.03,28.25 97.93,28.25 97.93,28.05 98.03,28.05 98.18,28.1 98.53,28.1
  region net IQS_RX6: 98.53,28 98.18,28 98.03,27.95 98.03,27.75 98.18,27.7 98.53,27.7
  region net IQS_RX4: 98.78,27.6 98.18,27.6 98.03,27.65 97.93,27.65 97.93,27.45 98.03,27.45 98.18,27.5 98.78,27.5
  region net IQS_RX5: 98.53,27.4 98.18,27.4 98.03,27.35 98.03,27.15 98.18,27.1 98.53,27.1
  region net IQS_RX0: 98.53,27 98.18,27 98.03,27.05 97.93,27.05 97.93,26.85 98.03,26.85 98.18,26.9 98.53,26.9
  region net GND: 98.53,26.8 98.18,26.8 98.03,26.75 98.03,26.55 98.18,26.5 98.53,26.5
  region net GND: 97.095,26.75 63.85,26.75 63.85,26.25 97.091,26.25
  region net GND: 98.53,26.4 98.18,26.4 98.03,26.45 97.93,26.45 97.93,26.25 98.03,26.25 98.18,26.3 98.53,26.3
  region net IQS_TX7: 98.542,26.2 98.192,26.2 98.042,26.15 98.042,25.95 98.192,25.9 98.542,25.9
  region net GND: 97.093,25.85 63.862,25.85 63.862,23.85 97.079,23.85
  region net GND: 98.542,25.8 98.192,25.8 98.042,25.85 97.942,25.85 97.942,25.65 98.042,25.65 98.192,25.7 98.542,25.7
  region net GND: 98.53,25.6 98.18,25.6 98.03,25.55 98.03,25.35 98.18,25.3 98.53,25.3
  region net GND: 98.78,25.2 98.18,25.2 98.03,25.25 97.93,25.25 97.93,25.05 98.03,25.05 98.18,25.1 98.78,25.1
  region net GND: 98.53,25 98.18,25 98.03,24.95 98.03,24.75 98.18,24.7 98.53,24.7
  region net GND: 98.53,24.6 98.18,24.6 98.03,24.65 97.93,24.65 97.93,24.45 98.03,24.45 98.18,24.5 98.53,24.5
  region net GND: 98.53,24.4 98.18,24.4 98.03,24.35 98.03,24.15 98.18,24.1 98.53,24.1
  region net GND: 98.53,24 98.18,24 98.03,24.05 97.93,24.05 97.93,23.85 98.03,23.85 98.18,23.9 98.53,23.9
  region net IQS_TX0: 98.53,23.8 98.18,23.8 98.03,23.75 98.03,23.55 98.18,23.5 98.53,23.5
  region net IQS_TX14: 98.53,23.4 98.18,23.4 98.03,23.45 97.93,23.45 97.93,23.25 98.03,23.25 98.18,23.3 98.53,23.3
  region net IQS_TX1: 98.53,23.2 98.18,23.2 98.03,23.15 98.03,22.95 98.18,22.9 98.53,22.9
  region net IQS_TX13: 98.78,22.8 98.18,22.8 98.03,22.85 97.93,22.85 97.93,22.65 98.03,22.65 98.18,22.7 98.78,22.7
  region net IQS_TX6: 98.53,22.6 98.18,22.6 98.03,22.55 98.03,22.35 98.18,22.3 98.53,22.3
  region net IQS_TX12: 98.53,22.2 98.18,22.2 98.03,22.25 97.93,22.25 97.93,22.05 98.03,22.05 98.18,22.1 98.53,22.1
  region net IQS_TX5: 98.53,22 98.18,22 98.03,21.95 98.03,21.75 98.18,21.7 98.53,21.7
  region net 3V3: 49.04,21.88 49.04,21.5 48.805,21.5 48.19,20.885 48.19,20.505 47.71,20.505 47.575,20.37 47.575,18.35 46.225,18.35 46.225,19.545 48.56,21.88
  region net IQS_TX11: 98.53,21.6 98.18,21.6 98.03,21.65 97.93,21.65 97.93,21.45 98.03,21.45 98.18,21.5 98.53,21.5
  region net IQS_TX4: 98.53,21.4 98.18,21.4 98.03,21.35 98.03,21.15 98.18,21.1 98.53,21.1
  region net GND: 49.04,21.09 49.04,19.715 47.71,19.715 47.71,20.095 47.945,20.095 48.561,20.711 48.561,21.09
  region net IQS_TX10: 98.53,21 98.18,21 98.03,21.05 97.93,21.05 97.93,20.85 98.03,20.85 98.18,20.9 98.53,20.9
  region net IQS_TX3: 98.531,20.8 98.181,20.8 98.031,20.75 98.031,20.55 98.181,20.5 98.531,20.5
  region net IQS_TX9: 98.531,20.4 98.181,20.4 98.031,20.45 97.931,20.45 97.931,20.25 98.031,20.25 98.181,20.3 98.531,20.3
  region net IQS_TX2: 98.53,20.2 98.18,20.2 98.03,20.15 98.03,19.95 98.18,19.9 98.53,19.9
  region net IQS_TX8: 98.53,19.8 98.18,19.8 98.18,19.6 98.53,19.6
Bottom Layer:
  region net GND: 64.723,29.999 63.973,30.75 63.95,30.75 63.95,18.327 64.234,18.938 64.723,19.101
  region net GND: 93.905,29.364 94.606,29.364 94.606,19.822 94.692,19.736 93.991,19.736
  region net GND: 98.138,29.364 98.84,29.364 98.836,29.361 98.836,19.826 98.926,19.736 98.224,19.736

## Silkscreen, mask and mechanical layers (free items; w line width, h text height)
Top Overlay:
  text "U3 Programming" at 22.953,43.836 h1
  text "U3 SWIN" at 43.323,33.999 h1 r90
  text "U3 reset" at 55.347,33.153 h1 r90
  text "U2 boot" at 6.997,25.403 h1 r90
  text "U2 RnD" at 6.697,12.003 h1 r90
  text "U2 reset" at 41.197,6.753 h1 r90
  text "Snapdome RnD" at 5.703,6.086 h1
  text "U2 debug port" at 22.453,4.936 h1
  text "TP-EVALBOARD-REV0.1" at 40.853,4.003 h1
  text "OV Tech GmbH" at 40.762,2.598 h1
Board outline:
  lines w0.05: 94.297,19.43 98.53,19.43 100.08,19.43 ccw(c100.08,19.63) 100.28,19.63 100.28,29.47 ccw(c100.08,29.47) 100.08,29.67 98.534,29.67 94.3,29.67 66.3,29.67 cw(c66.3,31.67) 64.3,31.67 64.3,47.1 ccw(c62.3,47.1) 62.3,49.1 2,49.1 ccw(c2,47.1) 0,47.1 0,2 ccw(c2,2) 2,0 62.3,0 ccw(c62.3,2) 64.3,2 64.3,17.43 cw(c66.3,17.43) 66.3,19.43 94.297,19.43 ; 94.297,19.43 94.297,19.43
Stiffener position:
  lines w0.05: 1.9,0 62.3,0 ccw(c62.3,2) 64.3,2 64.3,17.43 64.3,31.67 64.3,47.1 ccw(c62.3,47.1) 62.3,49.1 1.9,49.1 ; 2,0 cw(c2,2) 0,2 0,47.1 cw(c2,47.1) 2,49.1 ; 94.297,19.43 94.3,29.67 98.534,29.67 100.08,29.67 cw(c100.08,29.47) 100.28,29.47 100.28,19.63 cw(c100.08,19.63) 100.08,19.43 98.53,19.43 94.297,19.43 ; 94.297,19.43 94.297,19.43
  text "Stiffener: FR4, 1.0mm" at 21.453,23.786 h1
  text "Bottom side" at 21.503,22.303 h1
  text "Bottom side" at 98.943,20.842 h0.5 r90
  text "Stiffener:" at 96.975,20.825 h0.5 r90
  text "Polyimide, 0.1mm" at 97.939,20.779 h0.5 r90

## Text inside footprints (layer, text, board x,y; h text height)
J2: Assembly Notes "PCB Edge" at 0.15,37.85 h0.41 r270